# Altium PCB Wen Ting Wang WARG Bootcamp.PcbDoc
Units mil, origin at the board's own origin, x right, y up, seen from the top; angles counter-clockwise.
Board outline 1535 x 560 mil, 2 copper layers (Top Layer, Bottom Layer); 9 components, 5 nets, 20 pads, 23 vias.
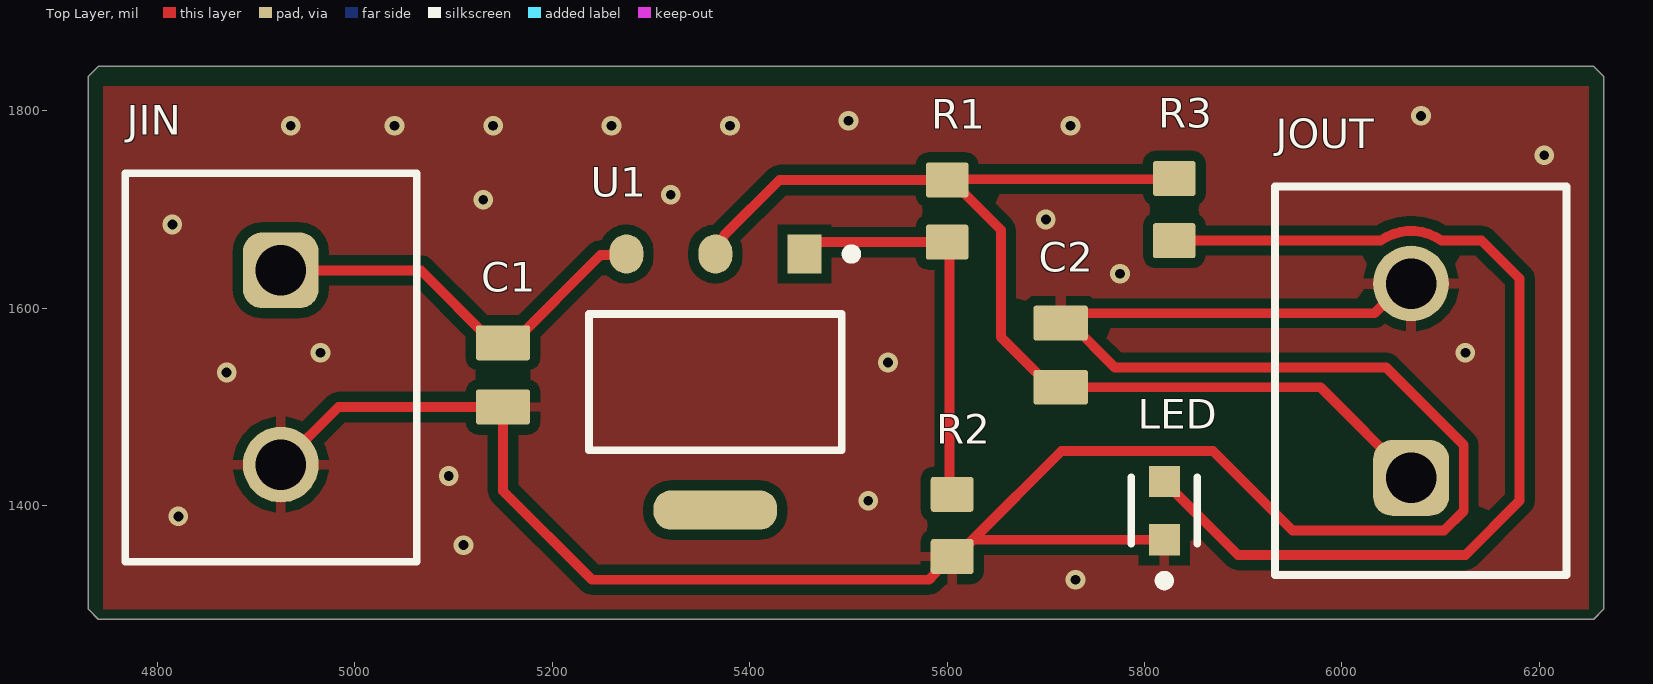
[diagram p0: Top Layer view]
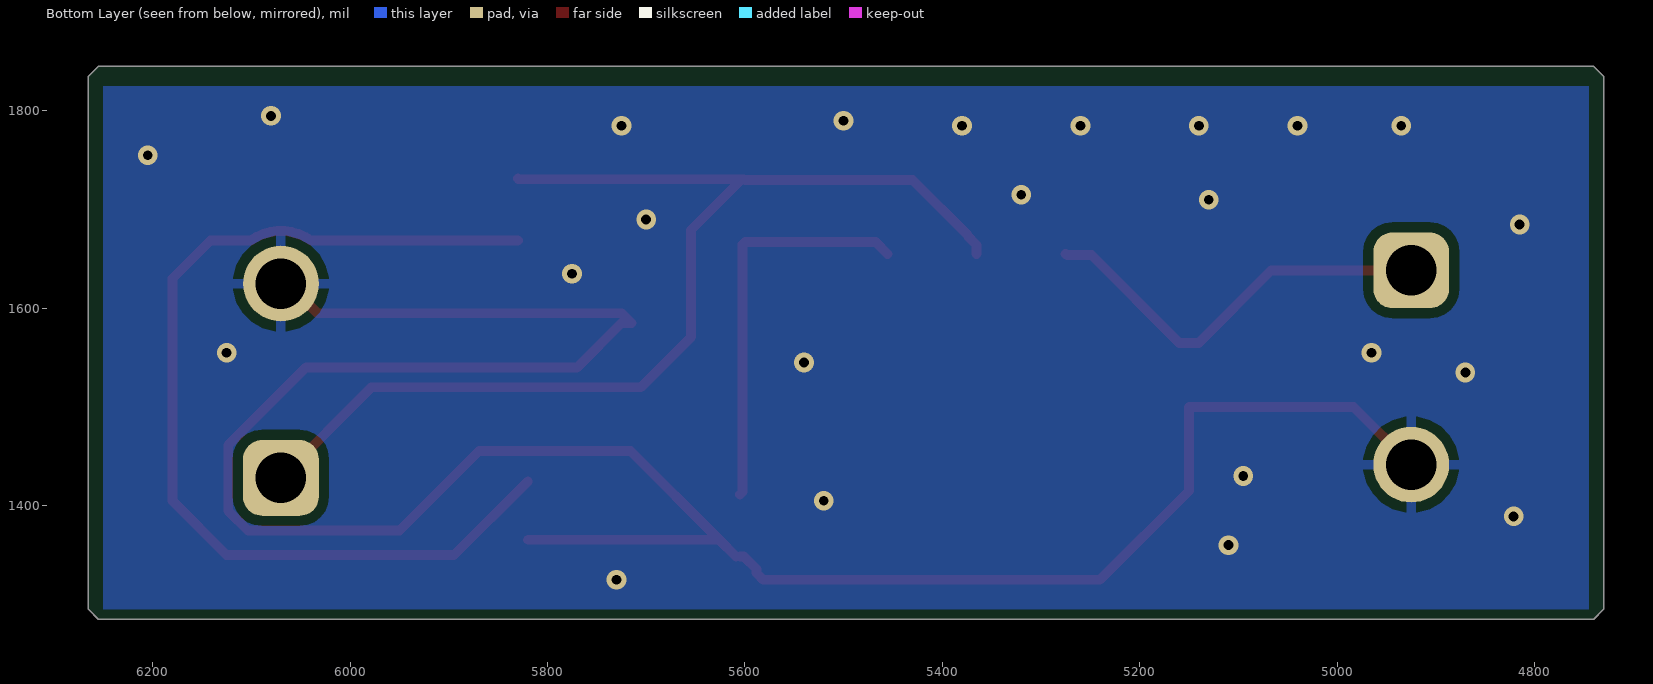
[diagram p1: Bottom Layer view, seen from below]
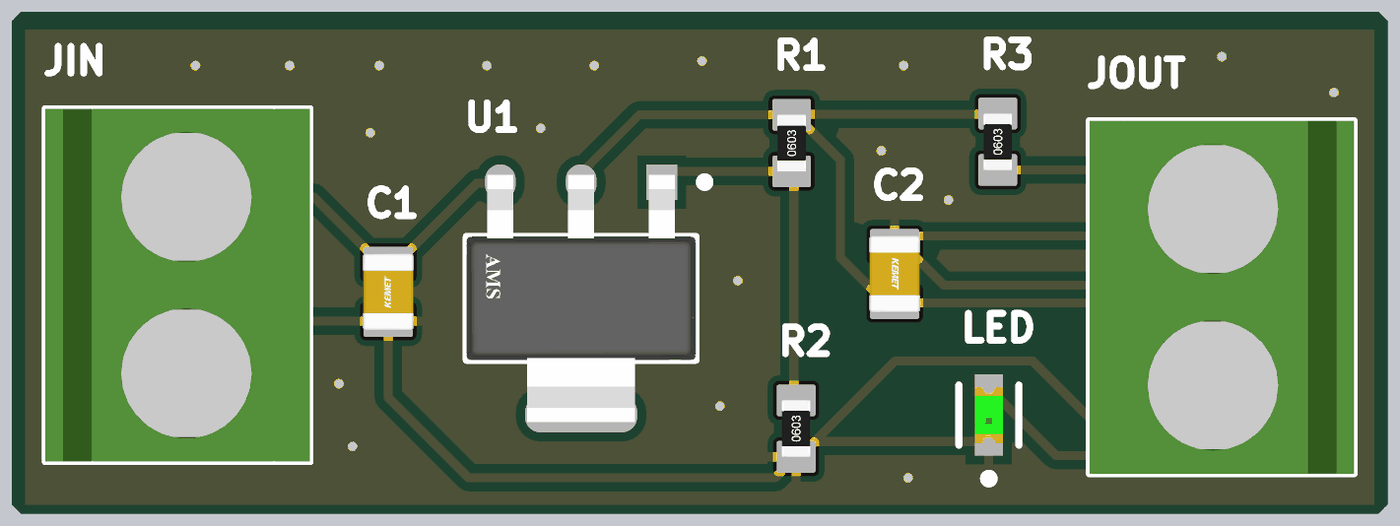
[diagram p2: 3D render of the assembled board from above, using the file's embedded part models]

## Layer stack, top to bottom
Top Solder: solder mask 0.4, Solder Resist, Dk 3.5
Top Layer: signal copper 1.4
Dielectric 1: dielectric 12.6, FR-4, Dk 4.8
Bottom Layer: signal copper 1.4
Bottom Solder: solder mask 0.4, Solder Resist, Dk 3.5

## Board outline
4730,1295 4740,1285 6255,1285 6265,1295 6265,1835 6255,1845 4740,1845 4730,1835

## Design rules (kind name [scope] priority, off if disabled: settings)
Clearance [All] p1: gap=10 ignorepadtopadclearanceinfootprint=FALSE
PolygonConnect [All] p1: connectstyle=Relief reliefconductorwidth=10 reliefentries=4 polygonreliefangle="90 Angle" airgapwidth=10
RoutingVias [All] p1: holewidth=28 width=50 viastyle="Through Hole" minholewidth=28 minwidth=50 maxholewidth=28 maxwidth=50
SolderMaskExpansion [All] p1: expansion=4 istentingtop=FALSE
SupplyNets "Schematic Supply Nets" [InNet('GND')] p1: voltage=0.000
Width [All] p1: maxlimit=10 minlimit=10 preferedwidth=10
30 further rules are at their usual default settings.

## Components (designator, comment, footprint, x,y, rotation, side; value= is the part's Value field where it differs from the comment)
C1 "GCM21BR71E105KA56L" CAP0805 5150,1532.52 r90 top value=1μF
C2 "GCM21BR71E105KA56L" CAP0805 5715,1552.48 r270 top value=1μF
JIN "691137710002" 691137710002 4915,1540 r270 top
JOUT "691137710002" 691137710002 6079.84,1526.57 r90 top
LED "LTST-C190GKT" FP-LTST-C190GKT-MFG 5820,1395 r90 top
R1 "RNCP0603FTD10K0" RES0603 5600,1698.5 r90 top value=10kΩ
R2 "RNCP0603FTD10K0" RES0603 5605,1380 r90 top value=10kΩ
R3 "RNCP0603FTD10K0" RES0603 5830,1700 r90 top value=1kΩ
U1 "ams1117" FP-ams1117-IPC_C 5365.16,1525.28 r270 top

## Footprints (in the part's own frame and the unit in brackets; to place one, negate y for a bottom-side part, rotate by r counter-clockwise, add the part's x,y. Pads: shape width x height; smd on the part's side, far side on the other; paste and mask are expansions set on the pad)
691137710002 [mm] "Horizontal Cable Entry with Pressure Clamp, pitch 5mm, 02p"
  rrect50% 1.95x1.95 hole 1.3: 1(-2.5,0.25)
  round 1.95 hole 1.3: 2(2.5,0.25)
  silkscreen extent -5,-3.75 5,3.75, body extent -5,-3.75 5,3.75, height 11.6
CAP0805 [mm] "Chip Capacitor, Body 2.0x1.2mm, Height 0.45mm, IPC Medium Density"
  rrect15% 0.9x1.4 smd: 1(-0.825,0) 2(0.825,0)
  body extent -1.1,-0.73 1.1,0.72, height 1.39
FP-ams1117-IPC_C [mm]
  rect 1.004x0.872 smd paste+0 mask+0: 1(-3.295,2.29)
  rrect100% 1.004x0.872 smd paste+0 mask+0: 2(-3.295,0) 3(-3.295,-2.29)
  rrect87% 1.004x3.182 smd paste+0 mask+0: 4(3.295,0)
  silkscreen extent -3.42,-3.25 1.75,3.63, body extent -3.9,-3.35 3.9,3.35, height 0.25
FP-LTST-C190GKT-MFG [mm]
  rect 0.8x0.8 smd paste+0 mask+0: 1(-0.75,0) 2(0.75,0)
  silkscreen extent -1.92,-0.85 0.85,0.85, body extent -1.25,-0.55 1.25,0.55, height 0.25
RES0603 [mm] "Chip Resistor, Body 1.6x0.8mm, IPC Medium Density"
  rrect15% 0.9x1.1 smd: 1(-0.8,0) 2(0.8,0)
  body extent -0.8,-0.4 0.8,0.4, height 0.46

## Part data
C1 C2: "CAP CER 1UF 25V X7R 0805", Manufacturer 1=Murata, Supplier Part Number 1=490-4785-1-ND, Voltage Rating=25V, Manufacturer Part Number 1=GCM21BR71E105KA56L, Supplier 1=Digi-Key
JIN JOUT: library part CMP-1502-03324-2, Current Rating=16A, Max Operating Temperature=120°C, Min Operating Temperature=-30°C, Voltage Rating=300V, Contact Material="Nickel, Tin", Height=11.6mm, Lead Pitch=5mm, NexarPartId=78871135, Number of Contacts=2, Number of Pins=2, Number of Rows=1, Packaging=Box, RoHS=Non-Compliant
LED: library part CMP-22017-000005-2, "LED GREEN CLEAR CHIP SMD", Case Code (Imperial)=0603, Case Code (Metric)=1608, Color=Green, Forward Current=30mA, Forward Voltage=2.1V, Lens Color=Colorless, Max Operating Temperature=85°C, Min Operating Temperature=-55°C, Package Quantity=1, Power Dissipation=100mW, Reverse Voltage=5V, Test Current=10mA, Voltage=2V, Case/Package=0603, Depth=0.8mm, Dominant Wavelength=569nm, Height=0.8mm, Illumination Color=Green, Lead Free="Lead Free", Length=1.6mm, Lens Style=Clear, Lens Transparency=Clear, Luminous Intensity=6mcd, Mount="Surface Mount", Number of Elements=1, Number of LEDs=1, Number of Pins=2, Packaging="Tape and Reel", Power Rating=100mW, Radiation Hardening=No, Viewing Angle=130°, Wavelength=565nm, Width=0.8mm
R1 R2 R3: "RES 10K OHM 1% 1/8W 0603", Manufacturer 1="Stackpole Electronics Inc", Power Rating=1/8W, Supplier Part Number 1=RNCP0603FTD10K0CT-ND, Manufacturer Part Number 1=RNCP0603FTD10K0, Supplier 1=Digi-Key
U1: library part CMP-209535-000002-1, "1A LOW DROPOUT VOLTAGE REGULATOR", RoHS Compliant=Yes

## Via types
v1: diameter 20, hole 10, Top Layer to Bottom Layer, tented both sides, 23 vias

## Nets (pads, with @x,y where several pads share a name; then routed paths per layer and width w, separated by ;. In a path a pad name is that pad's centre, name@x,y a point inside that pad or via, vN(x,y) a via of type N, cw(c..) or ccw(c..) an arc to the next point about the centre after c; other vN are vias at no path point)
GND: C1.1 C2.1 JIN.2 JOUT.2 LED.1 R2.1 | length 2531
  Top Layer w10: JIN.2 4983.31,1500.04 C1.1 5150,1415 5240,1325 5581.5,1325 5588.35,1331.85 5588.35,1335.79 5601.06,1348.5 R2.1 ; R2.1@5608.94,1348.5 5625.91,1365.47 ; LED.1 5625.91,1365.47 ; JOUT.2 6062.79,1625 6032.79,1595 5725.04,1595 C2.1 5724.84,1584.96 5769.8,1540 6044.89,1540 6123.39,1461.51 6123.39,1394.79 6103.36,1374.76 5949.79,1374.76 5869.28,1455.28 5715.71,1455.28 5625.91,1365.47
  other v1: 5730,1325 5110,1360 4821.09,1389.19 5520,1405 5095,1430 4870,1535 5540,1545 4965,1555 6125,1555 5775,1635 4815,1685 5700,1690 5130,1710 5320,1715 6205,1755 4935,1785 5040,1785 5140,1785 5260,1785 5380,1785 5725,1785 5500,1790 6080,1795
NetC1_2: C1.2 JIN.1 U1.3 | length 417.9
  Top Layer w10: JIN.1 5066.73,1638.43 5140.16,1565 5159.84,1565 5248.69,1653.85 5273.85,1653.85 U1.3
NetC2_2: C2.2 JOUT.1 R1.2 R3.2 U1.2 | length 1157.3
  Top Layer w10: U1.2 5365.16,1664.19 5374.13,1673.15 5374.13,1674.13 5430,1730 R1.2 5600.75,1730.75 5829.25,1730.75 R3.2 ; R1.2@5603.94,1730 5654.55,1679.39 5654.55,1570.61 5705.16,1520 C2.2 5978.15,1520 JOUT.1
NetLED_2: LED.2 R3.1 | length 1008.7
  Top Layer w10: LED.2 5894.53,1350 6125,1350 6180,1405 6180,1630 6141.5,1668.5 6100.94,1668.5 ccw(c6070,1625) 6039.06,1668.5 R3.1
NetR1_1: R1.1 R2.2 U1.1 | length 407.2
  Top Layer w10: U1.1 5467.32,1667.01 R1.1 5602.5,1664.51 5602.5,1414 R2.2
pads on no net: U1.4

## Polygon pours and split planes (outlines as drawn)
GND on Bottom Layer "GND_L02_P000" (solid, remove dead copper, pour order 0): 6250,1825 6250,1295 4745,1295 4745,1825
GND on Top Layer "GND_L01_P001" (solid, remove dead copper, pour order 1): 4745,1825 4745,1295 6250,1295 6250,1825

## Silkscreen, mask and mechanical layers (free items; w line width, h text height)
Mechanical 1:
  the board outline again, w10